# EAGLE board pinheader_pigoda_v1_final (EAGLE 7.6.0)
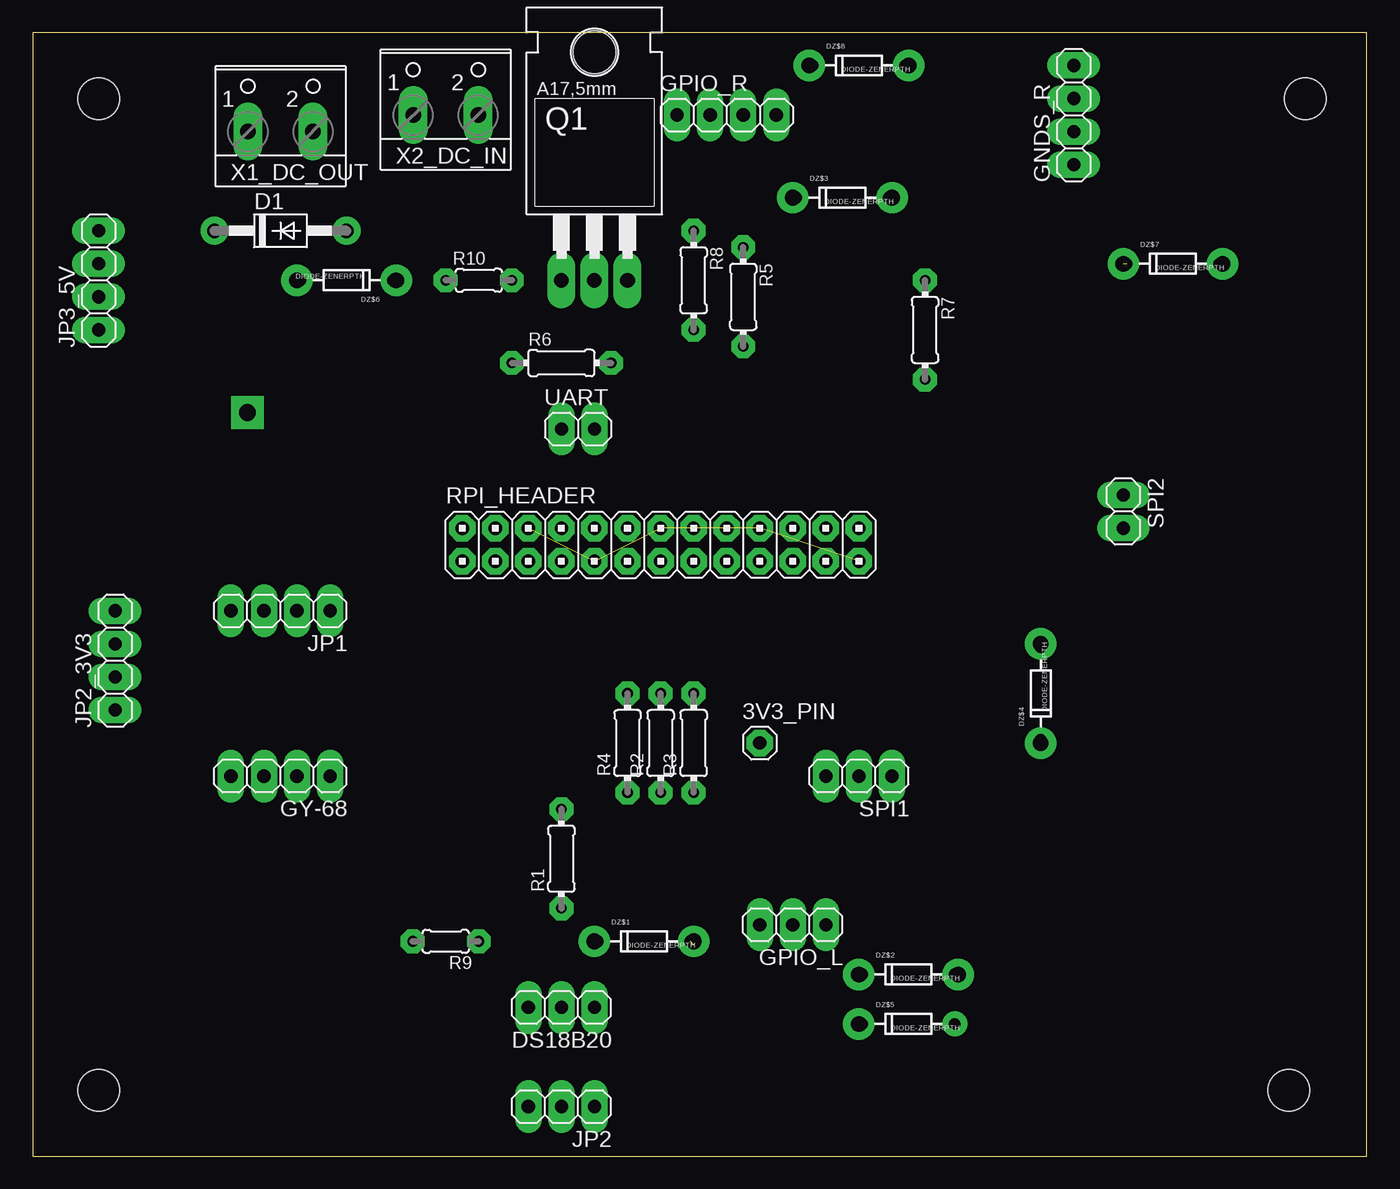
[diagram p0: board, top side]
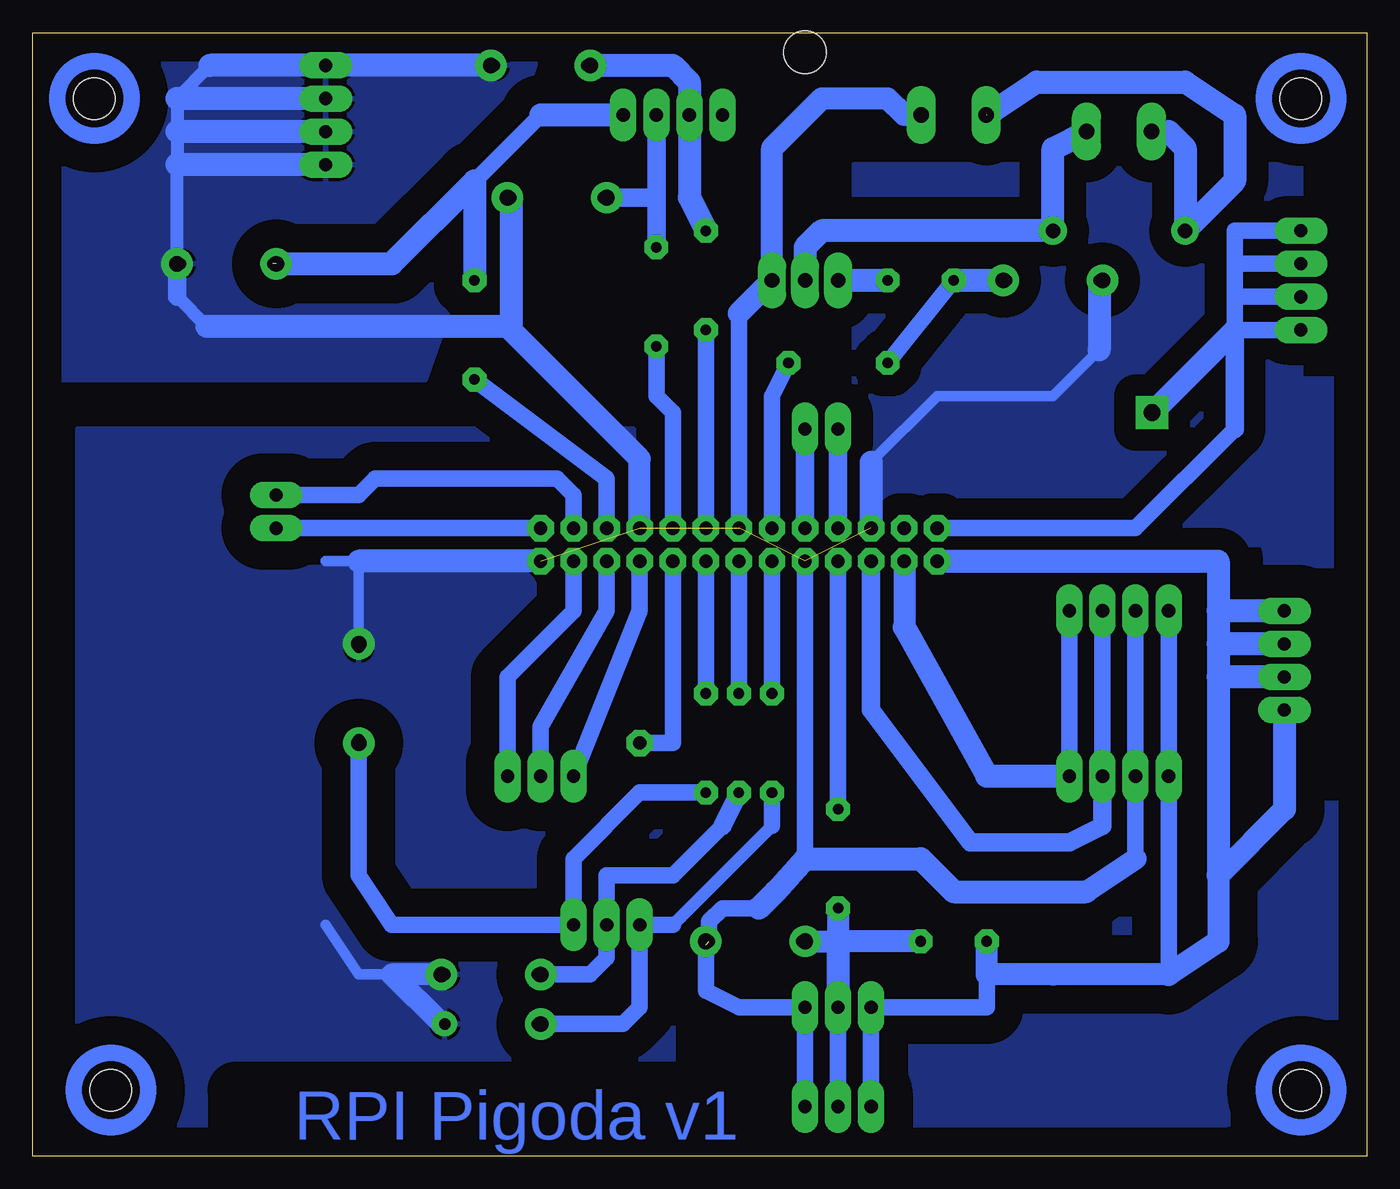
[diagram p1: board, bottom side, seen from below]

Size 102.54 x 86.35 mm. Coordinates in mm from the lower left corner, seen from the top.
Outline: 0,0 102.54,0 102.54,86.35 0,86.35 0,0
Copper layers (1*16): Top 0.035mm / dielectric 1.5mm / Bottom 0.035mm
Design rules "default *": minimum track width 24mil, minimum drill 24mil, track to track 8mil, track to pad 0mil, pad to pad 0mil, via to via 0mil, smd to smd 8mil, copper to edge 40mil, drill to drill 8mil, minimum pad ring 20mil, minimum via ring 24mil, stop-mask expansion 4mil, vias tented up to drill 0mil, thermal gap 10mil
Net classes: 0 default: width 0.61 mm
Holes 3.2 mm at 5.08,81.28 97.79,81.28 96.52,5.08 5.08,5.08

## Footprints (pad centres in the part's own frame; a part is rotated, then mirrored left to right if it is on the bottom)
1X01 = drill 1.016 octagon: 1 0,0
DO41-10 = drill 1.118 pad 1.93: A 5.08,0; C -5.08,0
1X03 = drill 1.016 long: 1 -2.54,0; 2 0,0; 3 2.54,0
DIODE-ZENER = drill 0.9: P$1 -3.556,0; P$2 3.556,0
1X04 = drill 1.016 long: 1 -3.81,0; 2 -1.27,0; 3 1.27,0; 4 3.81,0
TO220AH = drill 1.118 long: B -2.54,-6.35; C 0,-6.35; E 2.54,-6.35 | hole 3.302: 0,11.176
0204/7 = drill 0.813 octagon: 1 -3.81,0; 2 3.81,0
0204/5 = drill 0.813 octagon: 1 -2.54,0; 2 2.54,0
2X13 = drill 1.016 octagon: 1 -15.24,-1.27; 2 -15.24,1.27; 3 -12.7,-1.27; 4 -12.7,1.27; 5 -10.16,-1.27; 6 -10.16,1.27; 7 -7.62,-1.27; 8 -7.62,1.27; 9 -5.08,-1.27; 10 -5.08,1.27; 11 -2.54,-1.27; 12 -2.54,1.27; 13 0,-1.27; 14 0,1.27; 15 2.54,-1.27; 16 2.54,1.27; 17 5.08,-1.27; 18 5.08,1.27; 19 7.62,-1.27; 20 7.62,1.27; 21 10.16,-1.27; 22 10.16,1.27; 23 12.7,-1.27; 24 12.7,1.27; 25 15.24,-1.27; 26 15.24,1.27
1X02 = drill 1.016 long: 1 -1.27,0; 2 1.27,0
W237-102 = drill 1.194 long: 1 -2.5,-1.27; 2 2.5,-1.27

## Placement (x,y rotation side)
3V3_PIN  [1X01]  55.88,31.75 0 top
D1  1N4004  [DO41-10]  19.05,71.12 0 top
DS18B20  [1X03]  40.64,11.43 180 top
DZ$1  DIODE-ZENERPTH  [DIODE-ZENER]  46.99,16.51 0 top
DZ$2  DIODE-ZENERPTH  [DIODE-ZENER]  67.31,13.97 0 top
DZ$3  DIODE-ZENERPTH  [DIODE-ZENER]  62.23,73.66 0 top
DZ$4  DIODE-ZENERPTH  [DIODE-ZENER]  77.47,35.56 90 top
DZ$5  DIODE-ZENERPTH  [DIODE-ZENER]  67.31,10.16 0 top
DZ$6  DIODE-ZENERPTH  [DIODE-ZENER]  24.13,67.31 180 top
DZ$7  DIODE-ZENERPTH  [DIODE-ZENER]  87.63,68.58 0 top
DZ$8  DIODE-ZENERPTH  [DIODE-ZENER]  63.5,83.82 0 top
GNDS_R  GND  [1X04]  80.01,80.01 90 top
GPIO_L  [1X03]  58.42,17.78 180 top
GPIO_R  [1X04]  53.34,80.01 0 top
GY-68  [1X04]  19.05,29.21 180 top
JP1  i2c_ext  [1X04]  19.05,41.91 180 top
JP2  [1X03]  40.64,3.81 180 top
JP2_3V3  3v3_vcc  [1X04]  6.35,38.1 90 top
JP3_5V  5v_vcc  [1X04]  5.08,67.31 90 top
Q1  TIP120  [TO220AH]  43.18,73.66 0 top
R1  [0204/7]  40.64,22.86 90 top
R2  330  [0204/7]  48.26,31.75 90 top
R3  330  [0204/7]  50.8,31.75 90 top
R4  330  [0204/7]  45.72,31.75 90 top
R5  330  [0204/7]  54.61,66.04 270 top
R6  330  [0204/7]  40.64,60.96 0 top
R7  330  [0204/7]  68.58,63.5 270 top
R8  330  [0204/7]  50.8,67.31 270 top
R9  4k7  [0204/5]  31.75,16.51 180 top
R10  [0204/5]  34.29,67.31 0 top
RPI_HEADER  [2X13]  48.26,46.99 0 top
SPI1  [1X03]  63.5,29.21 180 top
SPI2  [1X02]  83.82,49.53 270 top
UART  [1X02]  41.91,55.88 0 top
X1_DC_OUT  [W237-102]  19.05,80.01 0 top
X2_DC_IN  [W237-102]  31.75,81.28 0 top

## Library data of the parts
3V3_PIN DS18B20 GNDS_R GPIO_L GPIO_R GY-68 JP1 JP2 JP2_3V3 JP3_5V RPI_HEADER SPI1 SPI2 UART = pinhead
D1 = adafruit
DZ$1-DZ$8 = Johnboiles
Q1 = transistor-power
R1-R10 = resistor
X1_DC_OUT X2_DC_IN = con-wago-500; MPN: 237-102; OC_FARNELL: unknown; OC_NEWARK: 70K9898

## Nets
+3V3: DS18B20.3 GY-68.4 JP1.4 JP2.3 JP2_3V3.1 JP2_3V3.2 JP2_3V3.3 JP2_3V3.4 R9.2 RPI_HEADER.1
+5V: JP3_5V.1 JP3_5V.2 JP3_5V.3 JP3_5V.4 RPI_HEADER.2
+12V: D1.C X1_DC_OUT.1 X2_DC_IN.1
GND2: DS18B20.1 DZ$1.P$2 DZ$2.P$2 DZ$3.P$2 DZ$4.P$2 DZ$5.P$2 DZ$6.P$2 DZ$7.P$2 DZ$8.P$2 GNDS_R.1 GNDS_R.2 GNDS_R.3 GNDS_R.4 GY-68.3 JP1.3 JP2.1 Q1.E RPI_HEADER.6 RPI_HEADER.9 RPI_HEADER.14 RPI_HEADER.20 RPI_HEADER.25 X2_DC_IN.2
N$1: DZ$2.P$1 GPIO_L.2 R2.1
N$2: DS18B20.2 DZ$1.P$1 JP2.2 R1.1 R9.1
N$3: R1.2 RPI_HEADER.7
N$4: DZ$4.P$1 GPIO_L.1 R3.1
N$5: RPI_HEADER.23 SPI1.1
N$7: DZ$5.P$1 GPIO_L.3 R4.1
N$8: R4.2 RPI_HEADER.11
N$9: R2.2 RPI_HEADER.13
N$10: R3.2 RPI_HEADER.15
N$11: Q1.B R10.2
N$12: GY-68.1 JP1.1 RPI_HEADER.3
N$13: 3V3_PIN.1 RPI_HEADER.17
N$14: DZ$3.P$1 GPIO_R.3 R5.1
N$15: RPI_HEADER.8 UART.1
N$16: RPI_HEADER.10 UART.2
N$17: DZ$6.P$1 R6.1 R10.1
N$18: DZ$7.P$1 GPIO_R.4 R7.1
N$19: DZ$8.P$1 GPIO_R.2 R8.1
N$20: R6.2 RPI_HEADER.12
N$21: R5.2 RPI_HEADER.18
N$22: R7.2 RPI_HEADER.22
N$23: R8.2 RPI_HEADER.16
N$24: RPI_HEADER.21 SPI1.2
N$25: RPI_HEADER.24 SPI2.1
N$26: RPI_HEADER.26 SPI2.2
N$27: RPI_HEADER.19 SPI1.3
N$31: GPIO_R.1
N$32: GY-68.2 JP1.2 RPI_HEADER.5
N$33: D1.A Q1.C X1_DC_OUT.2

## Tracks (layer width: path | path; a pad name or v marks a point on that pad's centre or on a via)
+3V3
  Bottom 1.27: 15.24,13.97 GY-68.4 JP1.4 | 29.21,13.97 29.21,11.43 DS18B20.3 JP2.3
  Bottom 1.676: 11.43,16.51 11.43,21.59 6.35,26.67 | 15.24,13.97 24.13,13.97 29.21,13.97 R9.2
  Bottom 1.778: RPI_HEADER.1 11.43,45.72 11.43,41.91 | 11.43,41.91 11.43,39.37 | 11.43,39.37 11.43,36.83 | 11.43,36.83 11.43,21.59 | 11.43,16.51 15.24,13.97 | JP2_3V3.4 11.43,41.91 | JP2_3V3.3 11.43,39.37 | JP2_3V3.1 6.35,26.67 | JP2_3V3.2 11.43,36.83
+5V  (via drill 1.3)
  Bottom 1.27: 10.16,66.04 10.16,64.77 10.16,63.5 JP3_5V.1 | 10.16,66.04 10.16,68.58 | 10.16,68.58 10.16,71.12 JP3_5V.4 | JP3_5V.3 10.16,68.58 | JP3_5V.2 10.16,66.04 | RPI_HEADER.2 17.78,48.26 10.16,55.88
  Bottom 1.422: 10.16,55.88 10.16,63.5
  Bottom 1.676: v16.51,57.15 10.16,63.5
+12V  (1 unrouted)
  Bottom 1.778: X1_DC_OUT.1 15.24,78.74 13.97,77.47 D1.C 10.16,74.93 10.16,80.01 13.97,82.55 25.4,82.55 29.21,80.01
GND2  (via drill 1.2 pad 1.27)  (5 unrouted)
  Bottom 0.406: 91.19,75.95 91.44,76.2
  Bottom 0.813: 80.01,45.72 77.47,45.72 v77.47,39.37 DZ$4.P$2 | DZ$2.P$2 v71.12,13.97 | 74.93,13.97 77.47,13.97 80.01,17.78 | DZ$5.P$2 71.12,10.16 | 38.1,53.34 33.02,58.42 24.13,58.42 20.57,61.98
  Bottom 1.016: 88.9,83.82 91.44,81.28 91.44,78.74 91.44,76.2 v91.44,68.58 | 65.79,63.75 66.04,63.75 | 89.15,63.75 91.44,66.04
  Bottom 1.27: 43.18,22.86 RPI_HEADER.9 | RPI_HEADER.14 48.26,64.77 | 17.78,22.86 GY-68.3 JP1.3 | JP2.1 DS18B20.1 48.26,11.43 50.8,12.7 50.8,16.26 | DZ$1.P$2 50.55,18.03 49.53,19.05 46.74,19.05
  Bottom 1.422: DZ$8.P$2 v67.31,83.82 | 91.44,66.04 v91.44,68.58
  Bottom 1.676: v71.12,13.97 74.93,13.97 71.12,10.16 | 48.26,64.77 Q1.E 45.72,77.47 41.91,81.28 36.83,81.28 35.56,80.01 X2_DC_IN.2 | 21.59,20.32 17.78,22.86 | RPI_HEADER.20 55.88,53.59 66.04,63.75
  Bottom 1.778: RPI_HEADER.25 77.47,45.72 | v67.31,83.82 GNDS_R.4 88.9,83.82 | GNDS_R.3 91.44,81.28 | GNDS_R.2 91.44,78.74 | GNDS_R.1 91.44,76.2 | 21.59,20.32 31.75,20.32 34.29,22.86 43.18,22.86 45.47,20.32 46.74,19.05 | 38.1,53.34 RPI_HEADER.6 | DZ$6.P$2 20.57,61.98 | DZ$3.P$2 65.79,63.75 | 66.04,63.75 89.15,63.75
  pour Bottom (isolate 2.184): 99.06,55.88 99.06,1.27 53.34,1.27 53.34,55.88
  pour Bottom (isolate 2.184): 72.39,59.69 101.6,59.69 101.6,86.36 63.5,86.36 63.5,85.09
  pour Bottom (isolate 1.676): 39.37,46.99 39.37,76.2 5.08,76.2 5.08,46.99
N$1  (via drill 1.2 pad 1.27)
  Bottom 0.61: DZ$2.P$1 v63.5,13.97
  Bottom 1.27: v63.5,13.97 59.69,13.97 58.42,15.24 GPIO_L.2 58.42,21.59 53.34,21.59 49.53,25.4
  Bottom 1.422: R2.1 49.53,25.4
N$2
  Bottom 0.813: 40.64,16.76 40.64,16.51
  Bottom 1.27: JP2.2 DS18B20.2
  Bottom 1.676: R1.1 40.64,16.76 | R9.1 40.64,16.51 DZ$1.P$1
  Bottom 1.778: 40.64,16.51 DS18B20.2
N$3
  Bottom 1.27: R1.2 RPI_HEADER.7
N$4  (via drill 1.2 pad 1.27)
  Bottom 0.61: v77.47,31.75 DZ$4.P$1
  Bottom 1.27: v77.47,31.75 77.47,21.59 74.93,17.78 GPIO_L.1 60.96,22.86 55.88,27.94 R3.1
N$5
  Bottom 1.27: RPI_HEADER.23 60.96,41.91 66.04,36.83 SPI1.1
N$7  (via drill 1.2 pad 1.27)
  Bottom 0.61: DZ$5.P$1 v63.5,10.16
  Bottom 1.016: 45.72,25.4 53.34,17.78
  Bottom 1.27: R4.1 45.72,25.4 | 53.34,17.78 GPIO_L.3 55.88,11.43 57.15,10.16 v63.5,10.16
N$8
  Bottom 1.27: R4.2 RPI_HEADER.11
N$9
  Bottom 1.27: R2.2 RPI_HEADER.13
N$10
  Bottom 1.27: R3.2 RPI_HEADER.15
N$11
  Bottom 1.778: Q1.B R10.2
N$12
  Bottom 1.27: GY-68.1 JP1.1
  Bottom 1.676: RPI_HEADER.3 35.56,40.64
  Bottom 1.778: 35.56,40.64 29.21,29.21 GY-68.1
N$13
  Bottom 1.27: 3V3_PIN.1 53.34,31.75 RPI_HEADER.17
N$14  (via drill 1.2 pad 1.27)
  Bottom 0.813: DZ$3.P$1 v58.42,73.66
  Bottom 1.422: GPIO_R.3 54.61,73.66 | 54.61,73.66 R5.1 | v58.42,73.66 54.61,73.66
N$15
  Bottom 1.422: UART.1 RPI_HEADER.8
N$16
  Bottom 1.422: UART.2 RPI_HEADER.10
N$17  (via drill 1.2 pad 1.27)
  Bottom 0.813: v27.94,67.31 DZ$6.P$1
  Bottom 1.27: R10.1 R6.1
  Bottom 1.778: R10.1 v27.94,67.31
N$18  (via drill 1.2 pad 1.27)  (1 unrouted)
  Bottom 1.27: 63.5,80.01 68.58,74.93
  Bottom 1.778: GPIO_R.4 63.5,80.01 | R7.1 68.58,74.93 74.93,68.58 v83.82,68.58
N$19  (via drill 1.2 pad 1.27)
  Bottom 0.813: DZ$8.P$1 v59.69,83.82
  Bottom 1.778: R8.1 52.07,73.66 GPIO_R.2 52.07,82.55 53.34,83.82 v59.69,83.82
N$20
  Bottom 1.27: R6.2 45.72,58.42 RPI_HEADER.12
N$21
  Bottom 1.27: RPI_HEADER.18 53.34,57.15 54.61,58.42 R5.2
N$22
  Bottom 1.27: R7.2 58.42,52.07 RPI_HEADER.22
N$23
  Bottom 1.27: R8.2 RPI_HEADER.16
N$24
  Bottom 1.27: SPI1.2 63.5,33.02 58.42,41.91 RPI_HEADER.21
N$25
  Bottom 1.27: RPI_HEADER.24 60.96,50.8 62.23,52.07 76.2,52.07 77.47,50.8 SPI2.1
N$26
  Bottom 1.27: RPI_HEADER.26 SPI2.2
N$27
  Bottom 1.27: SPI1.3 55.88,41.91 RPI_HEADER.19
N$32
  Bottom 1.27: JP1.2 GY-68.2
  Bottom 1.422: GY-68.2 20.32,25.4 22.86,24.13 30.48,24.13 38.1,34.29 RPI_HEADER.5
N$33
  Bottom 1.778: Q1.C 43.18,69.85 41.91,71.12 D1.A 24.13,77.43 X1_DC_OUT.2
S$1  (via drill 0.6)
  other vias: 5.08,81.28
S$2  (via drill 0.6)
  other vias: 5.08,5.08
S$3  (via drill 0.6)
  other vias: 96.52,5.08
S$4  (via drill 0.6)
  other vias: 97.79,81.28
S$5  (via drill 1.2 pad 1.27)
  other vias: 20.32,67.31
S$6  (via drill 1.2 pad 1.27)
  other vias: 66.04,73.66
S$7  (via drill 1.2 pad 1.27)
  other vias: 50.8,16.51
S$8  (via drill 1.2 pad 1.27)
  other vias: 43.18,16.51
S$9
  pour Bottom (isolate 2.184): 35.56,8.89 35.56,2.54 13.97,2.54 arc-90 -2.54,19.05 -2.54,26.67 35.56,26.67
S$10
  pour Bottom (isolate 2.54): 1.27,85.09 10.16,85.09 10.16,27.94 1.27,27.94
(copper drawn outside any net)
  shapes: Bottom circle x4

## Text on the board
Bottom: RPI Pigoda v1